# Altium PCB FROGSBORO.PcbDoc (part 3 of 3)
Units mm, origin at the board's own origin, x right, y up, seen from the top; angles counter-clockwise.
Board outline 36.5 x 67 mm, 6 copper layers (Top Layer, GND, SIGV, SIGH, Power, Bottom Layer), stack 1.197 mm thick; 116 components, 83 nets, 599 pads, 359 vias.
Unrouted connection lines stored in the file: 50.
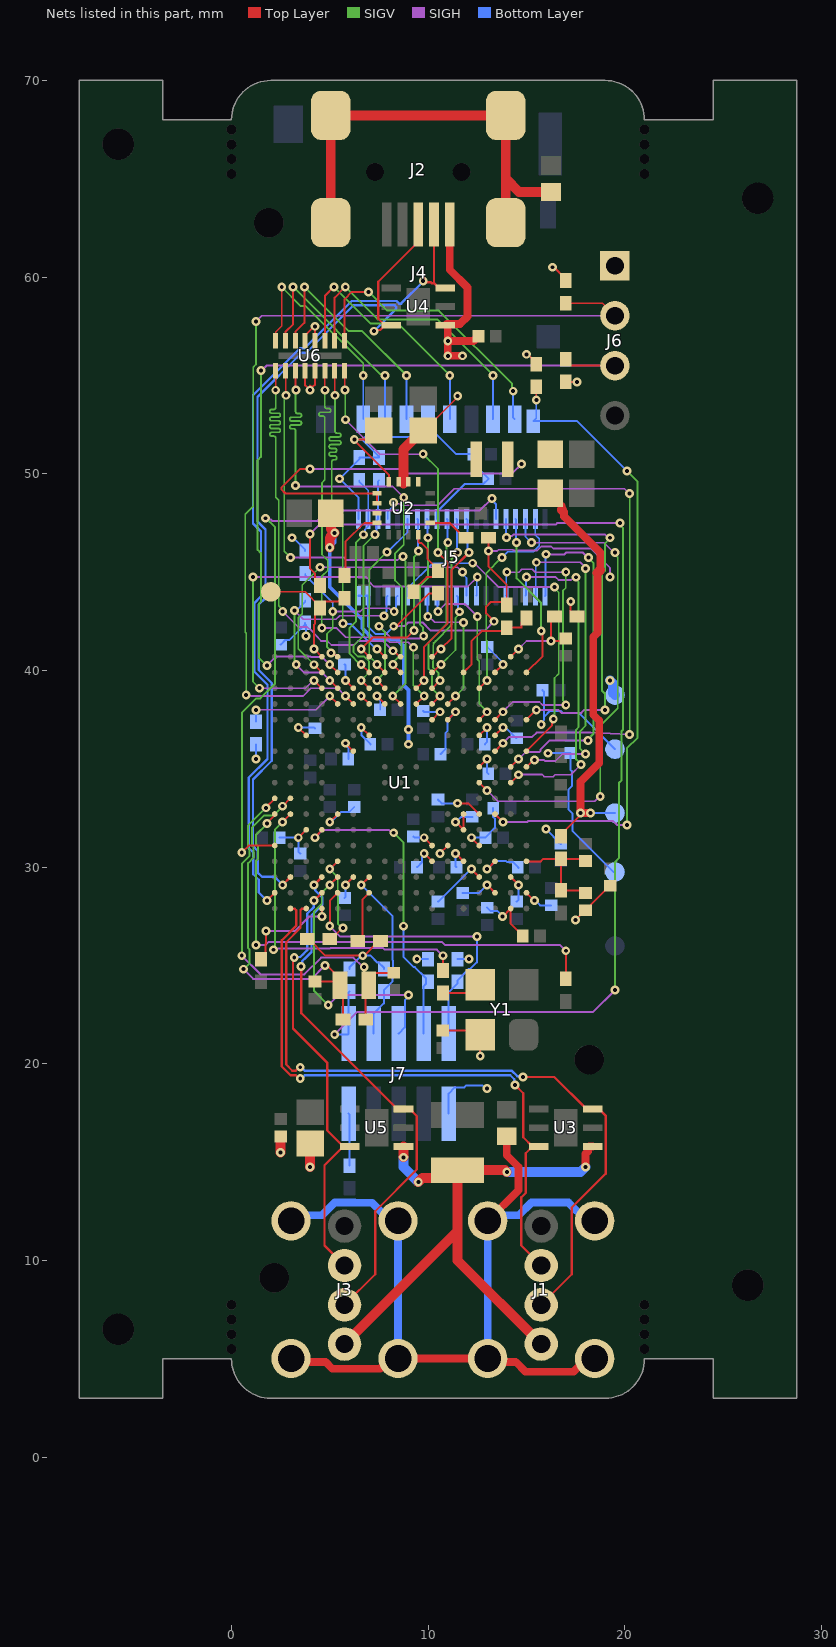
[diagram p6: the nets of this part, all layers, seen from the top]

## Via types
v1: diameter 0.45, hole 0.2, Top Layer to Bottom Layer, tented both sides, 359 vias

## Nets (pads, with @x,y where several pads share a name; then routed paths per layer and width w, separated by ;. In a path a pad name is that pad's centre, name@x,y a point inside that pad or via, vN(x,y) a via of type N, cw(c..) or ccw(c..) an arc to the next point about the centre after c; other vN are vias at no path point) (continued)
NetC46_2: C46.2 R10.2 U1.U10 Y2.2 | length 20.5
  Top Layer w0.102: v1(1.75,33.018) 1.75,33.034 2.2,33.484 U1.U10@2.2,33.5 ; v1(6.75,24.928) 6.75,24.225 Y2.2@6.975,24 ; R10.2@6.825,22.25 6.825,23.85 Y2.2@6.975,24 ; C46.2@8.25,24.63 7.299,24.63 6.975,24.306 Y2.2@6.975,24
  SIGH w0.102: v1(0.525,25.5) 1.477,24.548 2.036,24.548 3.711,24.548 4.566,25.403 6.203,25.403 6.677,24.928 v1(6.75,24.928)
  SIGV w0.102: v1(0.525,25.5) 0.525,30.18 0.928,30.583 0.928,30.917 0.837,31.008 0.837,32.105 v1(1.75,33.018)
NetC47_2: C47.2 R10.1 U1.T10 Y2.1 | length 19.2
  Top Layer w0.102: v1(2.6,33.1) U1.T10@3,33.5 ; C47.2@4.25,24.19 5.335,24.19 Y2.1@5.525,24 ; v1(4.75,25) 4.817,24.933 4.917,24.933 5.525,24.325 Y2.1@5.525,24 ; R10.1@5.675,22.25 5.675,23.85 Y2.1@5.525,24
  SIGH w0.102: v1(0.617,24.814) 1.105,24.325 4.075,24.325 v1(4.75,25)
  SIGV w0.102: v1(0.617,24.814) 0.928,25.125 0.928,25.805 0.847,25.885 0.847,30.21 1.134,30.498 1.134,31.002 1.043,31.093 1.043,32.009 1.65,32.616 2.116,32.616 v1(2.6,33.1)
NetC48_2: C48.2 R14.1 U1.B1 | length 4.2
  Top Layer w0.089: R14.1@16.25,42.494 v1(16.25,41.5) 16.87,41.5 C48.2@17,41.63
  Top Layer w0.102: U1.B1@14.2,40.7 v1(14.6,41.1)
  SIGH w0.089: v1(14.6,41.1) 15,41.5 v1(16.25,41.5)
NetC58_2: C58.2 C60.1 R5.1 R6.2 U1.A14 | length 6
  Top Layer w0.102: U1.A14@15,30.3 15.731,30.3 15.856,30.425 R5.1@16.75,30.425 ; C58.2@18,28.69 17.865,28.825 R6.2@16.75,28.825 R5.1@16.75,30.425 ; C60.1@18,30.31 17.885,30.425 R5.1@16.75,30.425
NetJ4_1: J4.1 U6.8 | length 11.5
  Top Layer w0.089: U6.8@2.25,56.765 2.25,57.209 2.557,57.517 v1(2.557,59.5)
  SIGV w0.089: v1(2.557,59.5) 3.53,58.527 3.783,58.527 6.699,55.612 v1@6.699,55.001
  Bottom Layer w0.089: J4.1@6.7,52.775 v1(6.7,55)
NetJ4_2: J4.2 U6.7 | length 11.6
  Top Layer w0.102: U6.7@2.75,56.765 2.75,57.216 3.134,57.6 v1(3.134,59.5)
  SIGV w0.102: v1(3.134,59.5) 7.568,55.067 7.733,55.067 v1(7.8,55)
  Bottom Layer w0.102: J4.2@7.8,52.775 v1(7.8,55)
NetJ4_3: J4.3 U6.6 | length 12.2
  Top Layer w0.102: U6.6@3.25,56.765 3.25,57.216 3.711,57.677 v1(3.711,59.5)
  SIGV w0.102: v1(3.711,59.5) 5.962,57.25 6.65,57.25 v1(8.9,55)
  Bottom Layer w0.102: J4.3@8.9,52.775 v1(8.9,55)
NetJ4_5: J4.5 U6.3 | length 12.9
  Top Layer w0.102: U6.3@4.75,56.765 4.75,59.039 v1(5.211,59.5)
  SIGV w0.102: v1(5.211,59.5) 7.061,57.651 8.449,57.651 v1(11.1,55)
  Bottom Layer w0.102: J4.5@11.1,52.775 v1(11.1,55)
NetJ4_7: J4.7 U6.2 | length 14.6
  Top Layer w0.102: U6.2@5.25,56.765 5.25,58.962 v1(5.788,59.5)
  SIGV w0.102: v1(5.788,59.5) 7.431,57.857 10.459,57.857 13.29,55.027 v1(13.29,54.99)
  Bottom Layer w0.102: v1(13.29,54.99) 13.29,52.785 J4.7@13.3,52.775
NetJ4_8: J4.8 U6.1 | length 14.6
  Top Layer w0.102: U6.1@5.75,56.765 5.75,58.884 6.116,59.25 v1(6.975,59.25)
  SIGV w0.102: v1(6.975,59.25) 7.925,58.3 10.55,58.3 14.273,54.577 14.273,54.252 v1(14.325,54.2)
  Bottom Layer w0.102: v1(14.325,54.2) 14.325,52.85 J4.8@14.4,52.775
NetJ4_9: J4.9 R19.1 U1.C11 | length 33
  Top Layer w0.089: v1(15.5,53.75) R19.1@15.5,54.425
  Top Layer w0.102: U1.C11@13.4,32.7 v1(13.8,32.3)
  SIGH w0.102: v1(13.8,32.3) 15.042,32.3 15.085,32.343 19.407,32.343 19.602,32.148 v1(20.102,32.148)
  SIGV w0.102: v1(20.102,32.148) 20.102,36.036 20.649,36.583 20.649,49.601 v1(20.102,50.148)
  Bottom Layer w0.089: J4.9@15.35,52.675 15.5,52.825 v1(15.5,53.75)
  Bottom Layer w0.102: J4.9@15.35,52.675 17.575,52.675 v1(20.102,50.148)
NetJ5_3: J5.3 R20.1 U1.L2 | length 10.8
  Top Layer w0.102: v1(6.6,40.3) U1.L2@7,39.9
  SIGV w0.089: 6.339,42.505 6.339,46.522 v1(6.721,46.904)
  SIGV w0.102: 6.339,42.505 6.005,42.172 6.005,40.854 6.559,40.3 v1(6.6,40.3)
  Bottom Layer w0.089: R20.1@6.5,49.675 6.5,49.6 6.95,49.15 J5.3@6.95,47.7 6.95,47.325 6.79,47.165 6.79,46.973 v1(6.721,46.904)
NetJ5_5: J5.5 R21.1 U1.L3 | length 12
  Top Layer w0.102: v1(6.6,39.5) U1.L3@7,39.1
  SIGV w0.089: v1(6.6,39.5) 6.996,39.896 6.996,40.464 6.755,40.706 6.437,40.706 6.206,40.937 6.206,41.263 6.717,41.775 6.717,46.34 7.297,46.92 v1(7.297,46.922)
  Bottom Layer w0.089: v1(7.297,46.922) 7.297,47.02 7.369,47.092 7.369,47.619 J5.5@7.45,47.7 7.45,49.625 R21.1@7.5,49.675
NetJ5_7: J5.7 U1.C7 | length 33
  Top Layer w0.102: U1.C7@13.4,35.9 v1(13.8,36.3)
  SIGH w0.089: v1(8.24,48.541) 8.309,48.472 8.519,48.472 8.595,48.396 10.486,48.396 11.336,49.246 19.986,49.246 20.232,49 v1(20.246,49) ; v1(13.8,36.3) 14.125,36.625 15.297,36.625 15.516,36.843 18.262,36.843 v1(20.246,36.75)
  SIGV w0.089: v1(20.246,36.75) v1(20.246,49)
  Bottom Layer w0.089: J5.7@7.95,47.7 7.95,48.075 8.171,48.296 8.171,48.472 v1(8.24,48.541)
NetJ5_8: J5.8 R22.1 U1.N3 | length 12.1
  Top Layer w0.102: v1(5,39.5) U1.N3@5.4,39.1
  SIGH w0.089: v1(3.201,43.049) 3.646,42.604 5.316,42.604 5.502,42.789 7.731,42.789 v1(7.75,42.77)
  SIGH w0.102: v1(3.295,40.3) 3.703,39.892 4.608,39.892 v1(5,39.5)
  SIGV w0.102: v1(3.201,43.049) 3.201,40.534 3.228,40.507 3.228,40.367 v1(3.295,40.3)
  Bottom Layer w0.089: v1(3.201,43.049) 3.27,43.118 3.368,43.118 3.75,43.5 R22.1@3.75,43.575 ; v1(7.75,42.77) 7.75,42.868 7.88,42.997 7.88,43.73 J5.8@7.95,43.8
NetJ5_10: J5.10 R23.1 U1.N1 | length 9.4
  Top Layer w0.102: v1(5.056,40.898) 5.122,40.832 5.217,40.832 5.349,40.7 U1.N1@5.4,40.7
  SIGH w0.089: v1(5.152,43) 6.551,43 6.718,43.166 8.019,43.166 8.178,43.007 v1(8.276,43.007)
  SIGV w0.089: v1(5.056,40.898) 5.056,40.996 4.854,41.198 4.854,41.854 5.152,42.153 v1(5.152,43)
  Bottom Layer w0.089: R23.1@3.75,44.925 3.75,44.85 5.152,43.448 v1(5.152,43) ; v1(8.276,43.007) 8.276,43.105 8.369,43.198 8.369,43.719 J5.10@8.45,43.8
NetJ5_11: J5.11 U1.K2 | length 9
  Top Layer w0.102: v1(7.4,40.3) U1.K2@7.8,39.9
  SIGV w0.089: v1(7.4,40.3) 7.4,40.335 7.006,40.729 7.006,45.132 v1(7.906,46.033)
  Bottom Layer w0.089: v1(7.906,46.033) 7.949,46.033 8.95,47.033 J5.11@8.95,47.7
NetJ5_12: J5.12 U1.A7 | length 18
  Top Layer w0.102: U1.A7@15,35.9 16.294,37.194 16.294,37.265 16.299,37.269 16.299,37.476 v1(16.364,37.541)
  SIGH w0.089: v1(12.266,45.455) 12.356,45.455 13.561,44.25 v1(16.427,44.25)
  SIGV w0.089: v1(16.364,37.541) 16.427,37.604 16.427,39.616 16.646,39.836 16.646,43.963 16.427,44.182 v1(16.427,44.25)
  Bottom Layer w0.089: J5.12@8.95,43.8 8.95,44.175 10.23,45.455 v1(12.266,45.455)
NetJ5_13: J5.13 U1.L1 | length 9.4
  Top Layer w0.102: U1.L1@7,40.7 v1(6.6,41.1) 7.171,41.67 8.909,41.67 v1(9.275,42.036)
  SIGV w0.102: v1(9.275,42.036) 9.275,45.765 9.504,45.994 v1(9.504,46.073)
  Bottom Layer w0.102: J5.13@9.45,47.7 9.475,47.675 9.475,46.102 v1(9.504,46.073)
NetJ5_15: J5.15 U1.K3 | length 12.4
  Top Layer w0.102: v1(7.4,39.5) U1.K3@7.8,39.1
  SIGH w0.102: v1(7.5,42.25) 7.514,42.25 8.128,41.635 9.567,41.635 9.681,41.749 v1(9.775,41.749)
  SIGV w0.102: v1(7.4,39.5) 7.803,39.903 7.803,41.947 v1(7.5,42.25) ; v1(9.775,41.749) 9.75,42.177 9.581,42.346 9.581,44.292 10,44.71 v1(10,46.75)
  Bottom Layer w0.102: J5.15@9.95,47.7 9.975,47.675 9.975,46.775 v1(10,46.75)
NetJ5_16: J5.16 U1.F4 | length 7.5
  Top Layer w0.102: U1.F4@11,38.3 v1(11.4,38.7)
  SIGH w0.089: v1(9.984,42.742) 10.043,42.742 10.336,42.449 v1(11.8,42.449)
  SIGV w0.089: v1(11.4,38.7) 11.8,39.1 v1(11.8,42.449)
  Bottom Layer w0.089: J5.16@9.95,43.8 9.967,43.783 9.967,42.759 v1(9.984,42.742)
NetJ5_18: J5.18 U1.D5 | length 8.9
  Top Layer w0.102: U1.D5@12.6,37.5 v1(13,37.9)
  SIGH w0.089: v1(10.5,43) 10.884,43.384 11.866,43.384 v1(12.5,42.75)
  SIGV w0.089: v1(12.5,42.75) 12.5,40.575 12.596,40.479 12.596,38.304 v1(13,37.9)
  Bottom Layer w0.089: J5.18@10.45,43.8 10.475,43.775 10.475,43.025 v1(10.5,43)
NetJ5_19: J5.19 U1.G4 | length 10.2
  Top Layer w0.102: U1.G4@10.2,38.3 v1(10.6,38.7)
  SIGV w0.102: v1(10.6,38.7) 10.195,39.105 10.195,39.911 10.025,40.081 10.025,41.429 10.178,41.582 10.903,42.333 10.933,42.364 10.933,46.433 v1(11,46.5)
  Bottom Layer w0.102: J5.19@10.95,47.7 10.975,47.675 10.975,46.525 v1(11,46.5)
NetJ5_21: J5.21 U1.G3 | length 9.4
  Top Layer w0.102: U1.G3@10.2,39.1 v1(10.6,39.5)
  SIGV w0.089: 10.281,41.393 10.256,41.263 10.256,41.229 10.256,40.466 10.254,40.464 10.254,40.136 10.531,39.858 10.531,39.569 v1(10.6,39.5)
  SIGV w0.102: 10.281,41.393 10.385,41.497 11.14,42.278 11.191,42.351 11.191,45.691 v1(11.5,46)
  Bottom Layer w0.102: J5.21@11.45,47.7 11.475,47.675 11.475,46.025 v1(11.5,46)
NetJ5_22: J5.22 U1.G2 | length 4.6
  Top Layer w0.102: U1.G2@10.2,39.9 10.225,39.9 10.625,40.3 v1(10.65,40.3)
  SIGV w0.089: v1(10.65,40.3) 11.391,41.041 11.391,42.687 11.593,42.89 v1(11.593,42.988)
  Bottom Layer w0.089: J5.22@11.45,43.8 11.524,43.726 11.524,43.057 v1(11.593,42.988)
NetJ5_23: J5.23 U1.G1 | length 7.9
  Top Layer w0.102: U1.G1@10.2,40.7 10.225,40.7 10.625,41.1 v1(10.65,41.1) ; v1@10.6,41.1 v1(10.65,41.1) ; v1(12.077,46) 11.191,45.114 11.191,41.64 v1(10.65,41.1)
  Bottom Layer w0.102: J5.23@11.95,47.7 12.013,47.636 12.013,46.064 v1(12.077,46)
NetJ5_24: J5.24 U1.P2 | length 14.9
  Top Layer w0.102: v1(4.2,40.294) 4.203,40.294 4.597,39.9 U1.P2@4.6,39.9
  SIGH w0.089: v1(4.5,45.25) 11.493,45.25 11.743,45 v1(11.75,45)
  SIGV w0.089: v1(4.2,40.294) 4.2,40.306 3.401,41.104 3.401,42.688 3.598,42.885 3.598,44.348 v1(4.5,45.25)
  Bottom Layer w0.089: v1(11.75,45) 11.75,44.902 11.95,44.702 J5.24@11.95,43.8
NetJ5_26: J5.26 U1.P3 | length 22.1
  Top Layer w0.102: v1(4.2,39.489) 4.206,39.489 4.594,39.1 U1.P3@4.6,39.1
  SIGH w0.089: v1(1.097,44.75) 6.854,44.75 7,44.604 7,44.514 7.244,44.269 12.019,44.269 v1(12.5,44.75) ; v1(1.42,39.1) 3.765,39.1 4.154,39.489 v1(4.2,39.489)
  SIGV w0.089: v1(1.097,44.75) 1.097,39.423 v1(1.42,39.1)
  Bottom Layer w0.089: J5.26@12.45,43.8 12.475,43.825 12.475,44.725 v1(12.5,44.75)
NetJ5_29: J5.29 U1.U13 | length 33
  Top Layer w0.102: v1(0.525,30.75) 0.875,31.1 U1.U13@2.2,31.1
  SIGH w0.102: v1(1.734,47.742) 1.801,47.675 2.008,47.675 2.084,47.599 4.359,47.599 4.899,48.139 12.639,48.139 v1(13.25,48.75)
  SIGV w0.102: v1(0.525,30.75) 0.525,37.845 1.259,38.579 1.469,38.579 2.203,39.313 2.203,47.297 1.758,47.742 v1(1.734,47.742)
  Bottom Layer w0.102: v1(13.25,48.75) 13.25,48.656 13.45,48.456 J5.29@13.45,47.7
NetJ5_31: J5.31 U1.A5 | length 19.7
  Top Layer w0.102: U1.A5@15,37.5 v1(15.5,38)
  SIGH w0.102: v1(13.987,46.763) 14.053,46.83 14.26,46.83 14.333,46.903 19.003,46.903 19.156,46.75 v1(19.25,46.75) ; v1(15.5,38) 16.623,38 16.776,37.847 17.793,37.847 17.946,38 v1(19,38)
  SIGV w0.102: v1(19,38) 19,38.804 18.847,38.957 18.847,44.917 19,45.07 19,46.466 19.25,46.716 v1(19.25,46.75)
  Bottom Layer w0.102: J5.31@13.95,47.7 13.968,47.682 13.968,46.782 v1(13.987,46.763)
NetJ5_32: J5.32 U1.C5 | length 15.2
  Top Layer w0.102: U1.C5@13.4,37.5 v1(13.8,37.9)
  SIGH w0.089: v1(13.8,37.9) 14.296,38.396 15.664,38.396 15.811,38.25 v1(17,38.25) ; v1(14,45) 14.622,45 14.769,45.146 15.293,45.146 15.439,45 v1(17,45)
  SIGV w0.089: v1(17,38.25) 17,38.348 16.854,38.494 16.854,44.046 17,44.192 v1(17,45)
  Bottom Layer w0.089: J5.32@13.95,43.8 13.975,43.825 13.975,44.975 v1(14,45)
NetJ5_33: J5.33 U1.A2 | length 8.7
  Top Layer w0.102: U1.A2@15,39.9 15.803,40.703 15.803,41.947 v1(15.75,42)
  SIGV w0.102: v1(14.5,46.5) 14.5,44.68 15.75,43.43 v1(15.75,42)
  Bottom Layer w0.102: J5.33@14.45,47.7 14.475,47.675 14.475,46.525 v1(14.5,46.5)
NetJ5_35: J5.35 U1.D9 | length 25.3
  Top Layer w0.102: U1.D9@12.6,34.3 v1(13,33.9)
  SIGH w0.089: v1(13,33.9) 13.546,33.354 18.479,33.354 18.715,33.59 v1(18.75,33.59) ; v1(15.25,46.5) 18.939,46.5 19.439,46 v1(19.5,46)
  SIGV w0.089: v1(18.75,33.59) 18.75,37.189 19.644,38.084 19.644,45.758 19.5,45.902 v1(19.5,46)
  Bottom Layer w0.089: J5.35@14.95,47.7 14.95,46.8 v1(15.25,46.5)
NetJ5_36: J5.36 U1.B9 | length 17.4
  Top Layer w0.102: U1.B9@14.2,34.3 v1(14.6,34.7)
  SIGH w0.089: v1(15,44.75) 16.488,44.75 16.634,44.604 17.28,44.604 17.418,44.742 v1(17.516,44.742) ; 15.78,34.7 15.814,34.7 15.911,34.604 16.355,34.604 16.451,34.7 17.25,34.7 v1(17.77,35.221)
  SIGH w0.102: v1(14.6,34.7) 15.78,34.7
  SIGV w0.089: v1(17.516,44.742) 17.516,44.644 17.646,44.514 17.646,37.109 17.531,36.993 17.523,36.985 17.523,35.48 17.77,35.233 v1(17.77,35.221)
  Bottom Layer w0.089: J5.36@14.95,43.8 14.975,43.825 14.975,44.725 v1(15,44.75)
NetJ5_37: J5.37 U1.D3 | length 10.8
  Top Layer w0.102: U1.D3@12.6,39.1 v1(13,39.5)
  SIGV w0.089: 13,41.48 12.952,41.528 12.952,44.952 v1(13.75,45.75)
  SIGV w0.102: v1(13,39.5) 13,41.48
  Bottom Layer w0.089: v1(13.75,45.75) 14.04,46.04 15.35,46.04 15.646,46.336 15.646,46.692 15.45,46.888 J5.37@15.45,47.7
NetJ5_38: J5.38 U1.A8 | length 17.4
  Top Layer w0.102: U1.A8@15,35.1 15.023,35.1 15.377,35.454 v1(15.4,35.454)
  SIGH w0.089: v1(15.4,35.454) 15.876,35.454 15.934,35.396 16.471,35.396 16.825,35.75 v1(18,35.75) ; v1(15.5,45.5) 17.743,45.5 18,45.243 v1(18,45.192)
  SIGV w0.089: v1(18,35.75) 17.725,36.025 17.725,36.913 18,37.188 v1(18,45.192)
  Bottom Layer w0.089: J5.38@15.45,43.8 15.475,43.825 15.475,45.475 v1(15.5,45.5)
NetJ5_40: J5.40 U1.B8 | length 18.5
  Top Layer w0.102: U1.B8@14.2,35.1 v1(14.6,35.5)
  SIGH w0.089: v1(14.6,35.5) 14.95,35.85 15.649,35.85 15.708,35.909 15.708,35.972
  SIGH w0.102: 15.708,35.972 16.182,36.447 v1(18.121,36.447) ; v1(16,45.91) 16.934,45.91 17.024,46 17.864,46 18.114,45.75 v1(18.148,45.75)
  SIGV w0.102: v1(18.121,36.447) 18.121,36.49 18.403,36.771 18.403,45.471 18.148,45.726 v1(18.148,45.75)
  Bottom Layer w0.102: J5.40@15.95,43.8 15.975,43.825 15.975,45.885 v1(16,45.91)
NetJ6_2: J6.2 R24.1 U1.M4 | length 46.3
  Top Layer w0.089: R24.1@17,58.675 18.865,58.675 J6.2@19.5,58.04
  Top Layer w0.102: v1(5.8,38.7) U1.M4@6.2,38.3
  SIGH w0.089: v1(0.75,38.75) 0.796,38.704 3.643,38.704 4.032,39.092 4.716,39.092 4.72,39.096 5.404,39.096 v1(5.8,38.7) ; v1(1.25,57.75) 1.54,58.04 J6.2@19.5,58.04
  SIGV w0.089: v1(0.75,38.75) 0.75,41.891 0.701,41.94 0.701,47.951 1.104,48.354 1.104,55.414 1.25,55.561 v1(1.25,57.75)
NetJ6_3: J6.3 R25.1 U1.N2 | length 40.3
  Top Layer w0.102: v1(5,40.3) U1.N2@5.4,39.9 ; R25.1@17,55.825 17,55.75 17.249,55.501 J6.3@19.499,55.501
  SIGH w0.102: v1(1.5,55.25) 1.534,55.25 1.784,55.5 J6.3@19.5,55.5 ; v1(1.8,40.25) 2.253,40.703 4.028,40.703 4.033,40.697 4.603,40.697 v1(5,40.3)
  SIGV w0.102: v1(1.5,55.25) 1.5,50.858 1.331,50.689 1.331,46.13 1.5,45.961 1.5,43.499 1.397,43.396 1.397,40.653 v1(1.8,40.25)
NetJ7_2: J7.2 R29.1 U1.N16 | length 15.1
  Top Layer w0.102: v1(5,27.003) 5.002,27.005 5.002,27.321 5.013,27.333 5.013,28.313 U1.N16@5.4,28.7
  SIGH w0.102: v1(5,27.003) 5.533,26.471 v1(12.48,26.471)
  Bottom Layer w0.102: J7.2@11.04,21.535 11.04,23.64 11.5,24.1 11.5,24.25 12.08,24.83 12.149,24.83 12.48,25.16 v1(12.48,26.471)
NetJ7_4: J7.4 R28.1 U1.P12 | length 15.8
  Top Layer w0.102: v1(4.25,31.5) 4.25,31.525 4.6,31.875 U1.P12@4.6,31.9
  SIGH w0.102: v1(4.25,31.5) 4.653,31.903 8.003,31.903 8.156,31.75 v1(8.25,31.75)
  SIGV w0.102: v1(8.25,31.75) 8.75,31.25 v1(8.75,27)
  Bottom Layer w0.102: v1(8.75,27) 8.75,25.43 9.258,24.922 9.328,24.922 9.885,24.365 9.885,24.06 9.77,23.945 J7.4@9.77,21.535
NetJ7_6: J7.6 U1.N15 | length 13.8
  Top Layer w0.102: v1(5,29.1) U1.N15@5.4,29.5
  SIGH w0.102: v1(4.921,22.99) 5.431,23.5 v1(9,23.5)
  SIGV w0.089: 4.214,27.754 4.24,27.78 4.596,28.136 4.596,28.696 v1(5,29.1)
  SIGV w0.102: 4.214,27.754 4.208,27.747 4.208,23.704 v1(4.921,22.99)
  Bottom Layer w0.102: J7.6@8.5,21.535 8.819,21.854 8.819,23.225 9,23.406 v1(9,23.5)
NetJ7_8: J7.8 R26.1 U1.L15 | length 9.2
  Top Layer w0.102: v1(6.6,29.1) U1.L15@7,29.5
  Bottom Layer w0.102: v1(6.6,29.1) 8.2,27.5 8.2,25.27 8.206,25.265 8.206,24.385 8.2,24.38 8.2,24.2 7.75,23.75 R26.1@7.75,23.675 7.75,23.08 7.23,22.56 J7.8@7.23,21.535
NetJ7_9: J7.9 R33.1 | length 2.7
  Bottom Layer w0.102: J7.9@5.96,17.465 6,17.425 R33.1@6,14.825
NetJ7_10: J7.10 R16.1 R30.1 | length 60.9
  Top Layer w0.102: v1(4,46.948) 4,45.18 4.251,44.93 4.251,44.574 R16.1@4.5,44.325
  SIGH w0.102: v1(4,46.948) 4.47,47.418 16.48,47.418 16.562,47.5 v1(19.75,47.5) ; v1(5.25,21.5) 6.375,22.625 18.375,22.625 v1(19.5,23.75)
  SIGV w0.102: v1(19.5,23.75) 19.5,30.261 19.7,30.461 19.7,34.279 19.844,34.423 19.844,36.917 19.903,36.976 19.903,47.253 19.75,47.406 v1(19.75,47.5)
  Bottom Layer w0.102: v1(5.25,21.5) 5.925,21.5 J7.10@5.96,21.535 5.96,23.635 R30.1@6,23.675
NetL1_1: L1.1 U2.5
NetR1_1: R1.1 U2.1 | length 2.1
  Top Layer w0.102: U2.1@10.1,47.5 11.1,47.5 11.85,46.75 R1.1@11.925,46.75
NetR2_1: R2.1 R3.2 U2.16 | length 4.1
  Top Layer w0.102: R3.2@9.25,44 9.25,44.075 9.926,44.751 10.251,44.751 10.5,45 R2.1@10.5,45.075 10.5,45.15 9.961,45.689 9.961,46.186 9.671,46.476 9.574,46.476 9.5,46.55 U2.16@9.5,46.9
NetR8_1: R8.1 Y1.3 | length 2.1
  Top Layer w0.102: R8.1@10.75,23.6 12.23,23.6 Y1.3@12.65,24.02
NetR8_2: R8.2 U1.T11 | length 16.8
  Top Layer w0.102: v1(2.6,32.3) U1.T11@3,32.7 ; R8.2@10.75,24.75 v1(10.75,25.5)
  SIGH w0.102: v1(2.137,25.803) 2.196,25.862 4.997,25.862 5.039,25.903 7.693,25.903 7.785,25.811 10.439,25.811 v1(10.75,25.5)
  SIGV w0.102: v1(2.137,25.803) 2.203,25.869 2.203,31.903 v1(2.6,32.3)
NetR9_2: R9.2 U1.U11 | length 24.5
  Top Layer w0.102: v1(1.816,32.213) 1.816,32.266 2.2,32.649 U1.U11@2.2,32.7 ; R9.2@17,24.325 v1(17,25.75)
  SIGH w0.102: v1(1.25,26.052) 1.747,26.052 1.901,26.205 10.696,26.205 10.85,26.052 16.698,26.052 v1(17,25.75)
  SIGV w0.102: v1(1.25,26.052) 1.25,30.321 1.341,30.412 1.341,31.088 1.25,31.179 1.25,31.646 v1(1.816,32.213)
NetR11_1: R11.1 U1.L16 | length 2.7
  Top Layer w0.102: R11.1@6.425,26.25 6.653,26.478 6.653,28.353 U1.L16@7,28.7
NetR12_1: R12.1 U1.P17 | length 5.1
  Top Layer w0.102: R12.1@1.5,25.325 1.734,25.559 1.734,26.103 1.75,26.12 v1(1.75,26.75) ; U1.P17@4.6,27.9 4.605,27.895 4.605,27.505 v1(4.611,27.5)
  SIGH w0.102: v1(1.75,26.75) 3.22,26.75 3.97,27.5 v1(4.611,27.5)
NetR13_2: R13.2 U1.N14 | length 4.8
  Top Layer w0.089: R13.2@5.003,26.351 5.078,26.351 5.634,26.908 v1(5.665,26.908)
  Top Layer w0.102: v1(5,29.9) U1.N14@5.4,30.3
  SIGV w0.089: v1(5,29.9) 5.404,29.496 5.404,28.478 5.418,28.464 5.418,27.138 5.4,27.12 5.612,26.908 v1(5.665,26.908)
NetR15_1: R15.1 U2.12 | length 3.5
  Top Layer w0.089: R15.1@5.796,45.075 5.796,46.54 6.756,47.5 U2.12@7.4,47.5
NetR15_2: R15.2 R16.2 TP1.0 U1.P1 | length 7.2
  Top Layer w0.089: TP1.0@2,44 3.75,44 4.5,43.25 R16.2@4.5,43.175
  Top Layer w0.102: R16.2@4.5,43.175 4.251,42.926 4.251,42.382 4.192,42.323 4.192,41.989 4.2,41.98 v1(4.2,41.1) U1.P1@4.6,40.7 ; R16.2@4.5,43.25 4.749,43.499 5.399,43.499 5.75,43.85 R15.2@5.75,43.925
NetR27_1: R27.1 U1.N4 | length 5.2
  Top Layer w0.102: v1(5,38.7) U1.N4@5.4,38.3
  SIGH w0.089: v1(1.25,38) 4.3,38 v1(5,38.7)
  Bottom Layer w0.102: R27.1@1.25,37.4 v1(1.25,38)
NetR31_2: R31.2 R32.2 U1.E2 | length 5.2
  Top Layer w0.102: U1.E2@11.8,39.9 12.2,40.3 12.2,41.48 12.72,42 13.825,42 R31.2@14,42.175 14.75,42.175 14.751,42.426 R32.2@15,42.675
NetU1_H3: U1.H3 U6.16 | length 20.2
  Top Layer w0.089: U6.16@5.75,55.235 5.763,55.222 5.763,54.276 v1(5.775,54.263)
  Top Layer w0.102: U1.H3@9.4,39.1 9.4,39.103 9.794,39.497 v1(9.794,39.5) ; v1@9.8,39.5 9.794,39.506 9.794,41.199 10.975,42.379 10.975,45.525 v1(10.5,46)
  SIGH w0.089: v1(5.8,52.75) 7.55,51 v1(9.75,51)
  SIGV w0.089: v1(5.775,54.263) 5.788,54.251 5.788,52.762 v1(5.8,52.75) ; v1(9.75,51) 10.5,50.25 v1(10.5,46)
NetU1_H4: U1.H4 U6.14 | length 22.7
  Top Layer w0.089: v1(4.75,54.25) U6.14@4.75,55.235
  Top Layer w0.102: U1.H4@9.4,38.3 v1(9.8,38.7)
  SIGH w0.089: v1(4.594,42.156) 5.345,42.156 5.81,41.69 7.79,41.69 8.047,41.433 8.995,41.433 v1(9.25,41.178)
  SIGV w0.089: v1(4.594,42.156) 4.594,44.784 4.896,45.086 4.896,45.604 4.604,45.896 4.604,49.546 4.75,49.692 4.75,52.791 4.75,52.836 ccw(c4.653,52.836) 4.653,52.933 4.547,52.933 cw(c4.547,53.03) 4.45,53.03 cw(c4.547,53.03) 4.547,53.127 4.953,53.127 ccw(c4.953,53.224) 5.05,53.224 ccw(c4.953,53.224) 4.953,53.321 4.847,53.321 cw(c4.847,53.418) 4.75,53.418 4.75,53.6 v1(4.75,54.25) ; v1(9.25,41.178) 9.25,39.25 v1(9.8,38.7)
NetU1_J1: U1.J1 U6.9 | length 22.8
  Top Layer w0.089: v1(2.25,54.25) U6.9@2.25,55.235
  Top Layer w0.102: v1@8.2,41.1 v1@8.253,41.047 ; v1(8.206,41.001) v1@8.253,41.047 ; U1.J1@8.6,40.7 8.553,40.7 8.253,41.001 v1@8.253,41.047
  SIGH w0.089: v1(2.606,43) 3.395,42.21 3.85,42.21 4.041,42.059 cw(c3.796,41.75) 4.088,42.015 4.512,41.549 4.564,41.496 4.601,41.496 4.883,41.496 5.086,41.294 6.233,41.294 6.436,41.496 7.71,41.496 v1(8.206,41.001)
  SIGV w0.089: v1(2.25,54.25) 2.25,53.7 2.25,53.371 cw(c2.153,53.371) 2.153,53.274 2.047,53.274 ccw(c2.047,53.177) 1.95,53.177 ccw(c2.047,53.177) 2.047,53.08 2.39,53.08 cw(c2.39,52.983) 2.487,52.983 cw(c2.39,52.983) 2.39,52.886 2.047,52.886 ccw(c2.047,52.789) 1.95,52.789 ccw(c2.047,52.789) 2.047,52.692 2.39,52.692 cw(c2.39,52.595) 2.487,52.595 cw(c2.39,52.595) 2.39,52.498 2.047,52.498 ccw(c2.047,52.401) 1.95,52.401 ccw(c2.047,52.401) 2.047,52.304 2.39,52.304 cw(c2.39,52.207) 2.487,52.207 cw(c2.39,52.207) 2.39,52.11 2.047,52.11 ccw(c2.047,52.013) 1.95,52.013 ccw(c2.047,52.013) 2.047,51.916 2.153,51.916 cw(c2.153,51.819) 2.25,51.819 2.25,51.775 2.25,48.803 2.403,48.65 2.403,43.3 2.606,43.098 v1(2.606,43)
NetU1_J2: U1.J2 U6.11 | length 23.2
  Top Layer w0.089: U6.11@3.25,55.235 3.263,55.222 3.263,54.276 v1(3.275,54.263)
  Top Layer w0.102: v1(8.206,40.3) 8.206,40.297 8.6,39.903 U1.J2@8.6,39.9
  SIGH w0.089: v1(3.25,49.403) 3.297,49.356 8.196,49.356 v1(8.759,48.793)
  SIGV w0.089: v1(3.25,49.403) 3.263,49.416 3.263,52.15 3.263,52.194 ccw(c3.166,52.194) 3.166,52.291 3.06,52.291 cw(c3.06,52.388) 2.963,52.388 cw(c3.06,52.388) 3.06,52.485 3.466,52.485 ccw(c3.466,52.582) 3.563,52.582 ccw(c3.466,52.582) 3.466,52.679 3.06,52.679 cw(c3.06,52.776) 2.963,52.776 cw(c3.06,52.776) 3.06,52.873 3.466,52.873 ccw(c3.466,52.97) 3.563,52.97 ccw(c3.466,52.97) 3.466,53.067 3.36,53.067 cw(c3.36,53.164) 3.263,53.164 3.263,53.425 3.263,54.251 v1(3.275,54.263) ; 8.653,42.214 8.653,42.826 8.67,42.844 8.67,44.223 8.32,44.573 8.32,45.952 8.759,46.392 v1(8.759,48.793)
  SIGV w0.102: v1(8.206,40.3) 8.206,40.394 8.653,40.841 8.653,42.214
NetU1_J4: U1.J4 U6.10 | length 23.5
  Top Layer w0.089: U6.10@2.75,55.235 2.758,55.227 2.758,54 v1(2.766,53.992)
  Top Layer w0.102: v1(8.2,38.7) U1.J4@8.6,38.3
  SIGH w0.089: v1(3.002,45.75) 5.704,45.75 5.84,45.614 8.445,45.614 8.618,45.788 v1(8.716,45.788)
  SIGV w0.089: v1(2.766,53.992) 2.766,53.894 2.681,53.809 2.681,46.072 v1(3.002,45.75) ; v1(8.2,38.7) 8.854,39.354 8.854,41.343 8.864,41.353 8.864,44.303 8.85,44.317 8.85,45.556 8.716,45.69 v1(8.716,45.788)
NetU1_K1: U1.K1 U6.15 | length 18.8
  Top Layer w0.089: U6.15@5.25,55.235 5.258,55.227 5.258,54 v1(5.266,53.992)
  Top Layer w0.102: v1(7.4,41.1) U1.K1@7.8,40.7
  SIGV w0.089: v1(5.266,53.992) 5.266,52.35 5.266,52.165 ccw(c5.363,52.165) 5.363,52.068 5.469,52.068 cw(c5.469,51.971) 5.566,51.971 cw(c5.469,51.971) 5.469,51.874 5.063,51.874 ccw(c5.063,51.777) 4.966,51.777 ccw(c5.063,51.777) 5.063,51.68 5.469,51.68 cw(c5.469,51.583) 5.566,51.583 cw(c5.469,51.583) 5.469,51.486 5.063,51.486 ccw(c5.063,51.389) 4.966,51.389 ccw(c5.063,51.389) 5.063,51.292 5.257,51.292 cw(c5.257,51.195) 5.354,51.195 cw(c5.257,51.195) 5.257,51.098 5.063,51.098 ccw(c5.063,51.001) 4.966,51.001 ccw(c5.063,51.001) 5.063,50.904 5.257,50.904 cw(c5.257,50.807) 5.354,50.807 cw(c5.257,50.807) 5.257,50.71 5.201,50.71 ccw(c5.201,50.613) 5.104,50.613 5.104,50.375 5.104,48.459 5.666,47.897 v1(5.666,42.393)
  Bottom Layer w0.102: v1(5.666,42.393) 5.696,42.363 6.069,42.363 7.331,41.1 v1(7.4,41.1)
USB_SHLDA: FB1.2 J2.S | length 22.4
  Top Layer w0.5: J2.S@5.05,62.769 J2.S@5.05,68.219 J2.S@13.95,68.219 13.95,65 ; J2.S@13.95,62.769 13.95,65 ; FB1.2@16.25,64.325 14.625,64.325 13.95,65
USB_SHLDBC: FB2.2 J1.S J3.S | length 48.1
  Top Layer w0.4: J3.S@3.03,5.02 3.2,4.85 4.78,4.85 5.13,4.5 7.544,4.5 8.064,5.02 J1.S@13.03,5.02 13.2,4.85 14.45,4.85 14.95,4.35 17.394,4.35 18.064,5.02 J1.S@18.47,5.02 ; J1.S@13.03,12.02 14.602,13.592 14.602,14.749 14,15.351 FB2.2@14,16.325
  Bottom Layer w0.4: J3.S@3.03,12.02 3.317,12.307 4.603,12.307 5.251,12.955 6.249,12.955 6.265,12.939 7.145,12.939 8.064,12.02 J3.S@8.47,12.02 J3.S@8.47,5.02 ; J1.S@13.03,5.02 J1.S@13.03,12.02 13.317,12.307 14.603,12.307 15.251,12.955 17.129,12.955 18.064,12.02 J1.S@18.47,12.02
USBA_N: J2.2 U1.U16 U4.3 | length 43.1
  Top Layer w0.117: v1(1.8,28.3) U1.U16@2.2,28.7 ; v1(9.75,59.802) 9.814,59.738 10.138,59.738 10.182,59.695 10.3,59.695 ; J2.2@10.3,62.674 10.3,59.695 ; U4.3@10.87,59.45 10.545,59.45 10.3,59.695
  Bottom Layer w0.117: v1(1.8,28.3) 1.389,28.711 1.389,29.357 1.109,29.638 1.109,30.747 0.874,30.982 0.874,34.543 1.831,35.5 1.831,39.27 1.167,39.934 1.167,43.433 1.508,43.774 1.508,47.073 1.101,47.48 1.101,53.996 3.483,56.378 3.709,56.378 6.118,58.787 8.396,58.787 8.53,58.653 8.627,58.653 9.75,59.776 v1(9.75,59.802)
USBA_P: J2.3 U1.T15 U4.6 | length 45.5
  Top Layer w0.117: v1(2.606,29.1) 2.606,29.103 3,29.497 U1.T15@3,29.5 ; v1(7.25,57.25) 7.314,57.314 7.569,57.314 U4.6@7.805,57.55 ; J2.3@9.5,62.674 9.5,61.799 7.466,59.765 7.466,57.889 U4.6@7.805,57.55 ; U4.6@7.805,57.55 U4.6@8.13,57.55 U4.6@7.805,57.55
  Bottom Layer w0.117: v1(2.606,29.1) 2.195,29.511 1.551,29.511 1.331,29.73 1.331,30.839 1.096,31.074 1.096,34.451 2.053,35.408 2.053,39.362 1.389,40.026 1.389,43.341 1.73,43.682 1.73,47.165 1.323,47.572 1.323,53.904 3.575,56.156 3.801,56.156 6.21,58.565 8.304,58.565 8.373,58.496 8.373,58.373 v1(7.25,57.25)
USBB_N: J1.2 U1.R17 U3.3 | length 36.9
  Top Layer w0.117: v1(3.498,19.829) 3.443,19.829 3.263,19.649 3.097,19.649 2.782,19.964 2.782,26.187 3.511,26.916 3.511,27.821 3.58,27.889 3.789,27.889 U1.R17@3.8,27.9 ; v1(14.829,19.329) 16.416,19.329 18.045,17.7 18.695,17.7 19.025,17.37 19.025,17.001 19.034,16.993 19.034,15.557 19.025,15.549 19.025,14.419 17.306,12.7 17.306,9.306 J1.2@15.75,7.75
  Bottom Layer w0.117: v1(3.498,19.829) 3.556,19.829 3.741,19.644 14.263,19.644 14.537,19.37 14.788,19.37 v1(14.829,19.329)
USBB_P: J1.3 U1.T17 U3.6 | length 31.6
  Top Layer w0.117: U1.T17@3,27.9 3.011,27.889 3.22,27.889 3.289,27.821 3.289,27.008 2.559,26.279 2.559,19.872 3.004,19.427 3.265,19.427 3.442,19.25 v1(3.5,19.25) ; v1(14.421,18.921) 14.837,18.505 14.837,16.268 U3.6@15.305,15.8 ; U3.6@15.63,15.8 U3.6@15.305,15.8 ; J1.3@15.75,9.75 14.736,10.764 14.736,13.212 14.966,13.441 14.966,15.461 U3.6@15.305,15.8
  Bottom Layer w0.117: v1(3.5,19.25) 3.563,19.25 3.735,19.422 14.171,19.422 14.38,19.213 14.38,18.962 v1(14.421,18.921)
USBC_N: J3.2 U1.P15 U5.3 | length 26.9
  Top Layer w0.117: v1(3.544,24.951) 3.544,22.581 8.425,17.7 9.075,17.7 9.425,17.35 9.425,14.629 7.306,12.51 7.306,9.306 J3.2@5.75,7.75 ; v1(4.2,29.1) U1.P15@4.6,29.5
  Bottom Layer w0.117: v1(3.544,24.951) 3.603,25.01 3.603,25.224 3.732,25.352 3.734,25.354 3.738,25.354 4.071,25.687 4.071,27.541 4.611,28.081 4.611,28.47 4.264,28.817 4.264,29.036 v1(4.2,29.1)
USBC_P: J3.3 U1.P16 U5.6 | length 21.9
  Top Layer w0.117: v1(3.192,25.408) 3.133,25.349 3.133,21.803 4.864,20.073 4.864,16.621 U5.6@5.685,15.8 ; v1(4.2,28.3) U1.P16@4.6,28.7 ; J3.3@5.75,9.75 4.736,10.764 4.736,14.851 U5.6@5.685,15.8 ; U5.6@6.01,15.8 U5.6@5.685,15.8
  Bottom Layer w0.117: v1(3.192,25.408) 3.218,25.434 3.499,25.434 3.64,25.574 ; 3.64,25.574 3.641,25.576 3.645,25.576 3.848,25.779 3.848,27.633 4.192,27.976 4.192,28.292 v1(4.2,28.3)
VDD1V8: C5.2 C6.1 C7.1 C8.1 C24.2 C25.2 C32.2 C34.1 C35.1 C36.1 C37.1 C38.1 C39.1 C40.1 C42.1 C43.1 C56.1 C58.1 C59.2 L1.2 R5.2 TP5.0 U1.A16 U1.B15 U1.B17 U1.C14 U1.C16 U1.D11 U1.D13 U1.D15 U1.E11 U1.E12 U1.E14 U1.F13 U1.G13 U1.G14 U2.9 U2.10 | length 69.1
  Top Layer w0.102: v1(4,50.25) 3.5,50.25 2.542,49.292 2.542,49.208 2.75,49 U2.9@7.4,49 U2.10@7.4,48.5 ; v1(9.8,30.7) U1.G14@10.2,30.3 ; v1(9.8,31.5) U1.G13@10.2,31.1 ; v1(10.6,30.7) U1.F13@11,31.1 ; v1(11.4,30.7) U1.E14@11.8,30.3 ; v1(11.4,32.3) U1.E12@11.8,31.9 U1.E11@11.8,32.7 ; v1(11.5,33.25) 12.05,33.25 U1.D11@12.6,32.7 ; v1(12.2,29.9) U1.D15@12.6,29.5 ; v1(12.2,31.5) U1.D13@12.6,31.1 ; v1(13,29.1) U1.C16@13.4,28.7 ; v1(13,29.9) U1.C14@13.4,30.3 ; v1(13.79,27.49) U1.B17@14.2,27.9 14.2,27.13 14.81,26.52 C35.1@14.81,26.5 ; U1.B15@14.2,29.5 v1(14.6,29.1) ; U1.A16@15,28.7 v1(15.4,28.3) ; R5.2@16.75,31.575 16.75,31.65 17.683,32.583 17.683,32.683 v1(17.75,32.75) ; v1(17.5,27.31) 17.5,27.33 17.98,27.81 C58.1@18,27.81 18.02,27.81 18.269,28.059 18.269,28.099 19.23,29.06 C59.2@19.25,29.06
  Top Layer w0.4: C25.2@16.2,48.95 16.795,48.355 16.795,48.191 ; 16.811,48.16 16.915,48.055 16.915,47.834 18.75,45.999 18.75,45.101 ; v1(18.25,32.75) v1(17.75,32.75) 17.75,34.349 18.699,35.298 18.699,37.449 18.398,37.751 18.398,41.699 18.602,41.903 18.602,44.953
  Top Layer w0.5: C25.2@16.2,48.95 C25.2@16.2,49 ; 16.795,48.191 16.811,48.175 16.811,48.16 ; 18.602,44.953 18.75,45.101
  SIGH w0.102: v1(4,50.25) 8.566,50.25 8.797,50.019 14.269,50.019 v1(14.75,50.5)
  Bottom Layer w0.102: C40.1@9.25,31.56 9.31,31.5 v1(9.8,31.5) ; C8.1@9.44,30 9.689,30.249 9.689,30.495 9.8,30.606 v1(9.8,30.7) ; C5.2@10.5,28.25 10.52,28.25 12.17,29.9 v1(12.2,29.9) ; C36.1@10.5,33.44 10.69,33.25 v1(11.5,33.25) ; v1(11.4,30.7) 11.4,30.04 C39.1@11.44,30 ; v1(11.4,32.3) 11.414,32.3 11.674,32.56 C38.1@12.25,32.56 ; C7.1@11.75,28.69 12.59,28.69 v1(13,29.1) ; v1(12.2,31.5) C37.1@12.92,31.5 12.92,31.52 13.397,31.997 13.397,32.467 13.31,32.554 C6.1@13.31,33 ; C34.1@13,27.94 13.173,27.767 13.533,27.767 13.79,27.51 v1(13.79,27.49) ; v1(13,29.9) 13.403,30.303 13.967,30.303 14,30.269 14.311,30.269 14.56,30.02 C56.1@14.56,30 C56.1@14.6,29.96 ; C43.1@14.5,28.25 14.6,28.35 v1(14.6,29.1) ; v1(15.4,28.3) 15.454,28.3 15.694,28.06 C42.1@16.25,28.06 ; v1(16,31.94) 16,31.92 16.73,31.19 C32.2@16.75,31.19 ; v1(18.25,32.75) TP5.0@19.5,32.75
VDD1V15: C1.2 C2.1 C3.1 C4.1 C31.2 C44.1 C55.1 TP6.0 U1.D6 U1.D8 U1.G5 U1.L6 U1.M7 U2.11 | length 30.7
  Top Layer w0.102: v1(5.8,36.3) U1.M7@6.2,35.9 ; v1(6.6,37.1) U1.L6@7,36.7 ; U1.G5@10.2,37.5 v1(10.6,37.9) ; U1.D8@12.6,35.1 v1(13,35.5) ; U1.D6@12.6,36.7 v1(13,37.1)
  Top Layer w0.5: v1(5,46.25) 5,46.75 v1(5.25,47) 5.05,47.2 C31.2@5.05,48
  Bottom Layer w0.102: v1(5.8,36.3) 5.8,36.206 5.94,36.066 C55.1@5.94,35.5 ; v1(6.6,37.1) 6.608,37.092 6.608,36.722 7.06,36.27 C2.1@7.06,36.25 ; C4.1@9.75,37.94 9.79,37.9 v1(10.6,37.9) ; C3.1@12.88,36.25 13,36.37 v1(13,37.1) ; v1(13,35.5) 13,34.81 C44.1@13.06,34.75 ; v1(16.098,35.793) 16.115,35.81 C1.2@17.25,35.81 17.25,34.938 17.31,34.878 17.31,34.122 17.143,33.956 17.143,32.926 17.347,32.722 17.347,31.833 19.43,29.75 TP6.0@19.5,29.75
  Bottom Layer w0.2: v1(5.25,47) 5.25,46.5 v1(5,46.25) 5,44.25 6.651,42.599 6.651,42.154 7.223,41.582 8.418,41.582 8.773,41.227 8.773,39.227 9,39 v1(9,37) v1(9,36.25)
VDD3V3: C9.2 C10.1 C11.2 C12.1 C13.1 C15.1 C16.1 C17.2 C18.1 C19.1 C20.1 C30.2 C45.1 C53.1 C54.2 C57.1 J4.4 J5.1 J5.17 J6.1 J7.1 R11.2 R13.1 R14.2 R19.2 R20.2 R21.2 R22.2 R23.2 R24.2 R25.2 R26.2 R27.2 R28.2 R29.2 R30.2 TP4.0 U1.C2 U1.C6 U1.F5 U1.K4 U1.L4 U1.M3 U1.M15 U1.N11 U1.R6 U1.R12 U2.8 U6.4 U6.5 U6.12 U6.13 Y1.4 | length 71.7
  Top Layer w0.102: v1(3.4,31.5) U1.R12@3.8,31.9 ; v1(3.4,37.1) U1.R6@3.8,36.7 ; U6.12@3.75,55.235 3.75,54.5 v1(4,54.25) ; U6.5@3.75,56.765 3.75,57.04 v1@4.21,57.5 ; R13.1@3.853,26.351 3.928,26.351 4.779,25.5 v1(6.675,25.5) 6.75,25.5 7.5,26.25 R11.2@7.575,26.25 ; 4,54.487 4.06,54.427 4.144,54.427 4.25,54.534 U6.13@4.25,55.235 ; U6.4@4.25,56.765 v1(4.25,57.5) ; v1(5,32.306) 5.003,32.306 5.397,32.7 U1.N11@5.4,32.7 ; v1(5.8,29.1) U1.M15@6.2,29.5 ; v1(5.8,39.5) U1.M3@6.2,39.1 ; v1(6.6,38.7) U1.L4@7,38.3 ; v1(7.4,38.7) U1.K4@7.8,38.3 ; C30.2@7.5,52.2 7.039,51.739 v1(6.246,51.739) 6.246,51.704 8,49.95 U2.8@8,49.6 ; C45.1@10.75,21.69 12.44,21.69 Y1.4@12.65,21.48 v1(12.65,20.4) ; U1.F5@11,37.5 v1(11.4,37.9) ; U1.C6@13.4,36.7 v1(13.8,37.1) ; U1.C2@13.4,39.9 v1(13.8,40.3) ; v1(15,56.075) 15.075,56.075 15.5,55.65 R19.2@15.5,55.575 ; v1(16.325,60.5) 16.4,60.5 17,59.9 R24.2@17,59.825 ; R25.2@17,54.675 v1(17.575,54.675) ; R14.2@17.25,42.925 v1(17.25,43.5)
  Bottom Layer w0.089: v1(5,32.306) 5.077,32.306 5.576,32.804 5.994,32.804 C19.1@6.25,33.06 ; v1(7.4,38.7) 7.4,38.613 7.56,38.453 C13.1@7.56,38 ; C16.1@13,41.19 13.02,41.19 13.731,40.479 13.731,40.369 v1(13.8,40.3)
  Bottom Layer w0.102: v1(1.25,35.5) R27.2@1.25,36.25 ; C17.2@2.44,31.5 v1(3.4,31.5) 3.4,30.79 C18.1@3.5,30.69 ; C11.2@2.5,41.31 2.749,41.559 2.959,41.559 R22.2@3.75,42.35 ; v1(3.075,46.75) 3.15,46.75 3.75,46.15 R23.2@3.75,46.075 ; v1(3.4,37.1) 4.21,37.1 C20.1@4.25,37.06 ; R22.2@3.75,42.425 R22.2@3.75,42.35 ; v1(3.796,41.75) 3.796,42.304 R22.2@3.75,42.35 ; C12.1@5.75,28.44 5.8,28.49 v1(5.8,29.1) ; C15.1@5.75,40.31 5.8,40.26 v1(5.8,39.5) ; R30.2@6,24.825 6,24.9 6.6,25.5 v1(6.675,25.5) 7.075,25.5 7.426,25.149 7.501,25.149 7.75,24.9 R26.2@7.75,24.825 ; v1(6.246,51.739) 6.661,51.739 ; J5.1@6.45,47.7 6.45,48.8 v1(5.5,49.75) 6.5,50.75 R20.2@6.5,50.825 R21.2@7.5,50.825 7.5,50.9 6.661,51.739 ; v1(9.425,25.325) R28.2@10,25.325 ; J5.17@10.45,47.7 10.45,48.075 11.856,49.481 12.811,49.481 13.06,49.73 13.06,49.77 12.31,50.52 C53.1@12.31,51 11.425,51 10,52.425 J4.4@10,52.775 9.557,52.775 9.421,52.639 9.421,52.026 9.277,51.882 6.805,51.882 6.661,51.739 ; C57.1@10.63,35.75 10.879,35.999 10.879,36.815 10.997,36.933 10.997,37.497 v1(11.4,37.9) ; J7.1@11.04,17.465 11.04,18.49 11.359,18.809 11.841,18.809 11.935,18.903 12.753,18.903 12.906,18.75 v1(13,18.75) ; R29.2@11.5,25.325 v1(12.075,25.325) ; v1(13.8,37.1) 13.867,37.033 14.007,37.033 14.48,36.56 C10.1@14.5,36.56 ; v1(15.75,37.25) 15.75,37.344 15.903,37.497 15.903,37.649 ; C9.2@15.81,39 15.903,38.907 15.903,37.649 ; TP4.0@19.5,36 17.653,37.847 16.833,37.847 16.736,37.944 16.198,37.944 15.903,37.649
VDD5V: C23.2 C49.2 C50.2 C51.2 C52.1 J1.1 J2.1 J3.1 J5.2 J5.4 R1.2 R2.2 R31.1 TP3.0 U2.6 U2.7 U3.1 U4.1 U5.1 | length 75.4
  Top Layer w0.089: C23.2@9.75,52.2 9.8,52.2 11.503,53.903 v1(11.503,53.95) v1@11.503,53.997 ; R1.2@13.075,46.75 v1(13.075,46.075) 13.075,45.279 14,44.354 R31.1@14,43.325
  Top Layer w0.102: v1(8.25,42.25) 8.317,42.317 8.462,42.317 9.706,43.56 9.706,43.584 10.047,43.925 R2.2@10.5,43.925 ; v1(13.348,42.5) 12.945,42.903 12.945,43.245 13.181,43.481 13.844,43.481 R31.1@14,43.325
  Top Layer w0.4: J2.1@11.1,62.674 11.1,60.374 12,59.474 12,58 11.625,57.625 10.945,57.625 U4.1@10.87,57.55 10.925,57.55 11,57.475 v1(11,56.75) ; v1(11.75,56) v1(11,56) v1(11,56.75) ; C49.2@12.56,57 12.56,56.98 12.51,56.93 12.49,56.93 12.31,56.75 v1(11,56.75) ; v1(18,14.75) 18,15.43 18.12,15.55 18.12,15.725 18.195,15.8 U3.1@18.37,15.8
  Top Layer w0.5: v1(2.5,15.5) C52.1@2.5,16.31 ; v1(4,14.75) C51.2@4,15.95 ; J3.1@5.75,5.75 11.5,11.5 ; v1(8.75,15.25) U5.1@8.75,15.8 ; 8.75,49.5 8.75,51.25 9.7,52.2 C23.2@9.75,52.2 ; v1(9.5,14) 9.7,14.2 11.1,14.2 C50.2@11.5,14.6 ; v1(14,14.5) 13.9,14.6 C50.2@11.5,14.6 ; J1.1@15.75,5.75 11.5,10 11.5,11.5 ; 11.5,11.5 C50.2@11.5,14.6
  SIGH w0.089: v1(13.075,46.075) 13.517,46.075 13.587,46.144 14.298,46.144 14.339,46.104 15.543,46.104 15.745,46.306 16.255,46.306 16.36,46.2 18.258,46.2 19.25,45.209 v1(19.25,44.75)
  SIGH w0.102: v1(8.25,42.25) 8.798,42.25 8.987,42.439 9.717,42.439 10.11,42.046 12.894,42.046 v1(13.348,42.5)
  Bottom Layer w0.102: J5.2@6.45,43.8 J5.4@6.95,43.8 6.95,42.23 7.333,41.847 7.847,41.847 v1(8.25,42.25)
  Bottom Layer w0.5: v1(8.75,15.25) 8.75,14.75 v1(9.5,14) ; v1(14,14.5) 17.75,14.5 v1(18,14.75) ; v1(19.25,39.5) 19.404,39.346 19.404,38.846 TP3.0@19.5,38.75
pads on no net: H1.1 H2.1 H3.1 H4.1 J2.4 J2.M J5.27 J5.28 J7.7 U1.A3 U1.A4 U1.A9 U1.A10 U1.A11 U1.B3 U1.B4 U1.B5 U1.B7 U1.B10 U1.B11 U1.C4 U1.C10 U1.C17 U1.D1 U1.D2 U1.D7 U1.D10 U1.D12 U1.D16 U1.D17 U1.E1 U1.E3 U1.E4 U1.E15 U1.E16 U1.E17 U1.F14 U1.G15 U1.G16 U1.G17 U1.H1 U1.H2 U1.H14 U1.H15 U1.H16 U1.H17 U1.J14 U1.J16 U1.J17 U1.K14 U1.K15 U1.K16 U1.K17 U1.L17 U1.N17 U1.P5 U1.P6 U1.P8 U1.P9 U1.P13 U1.R1 U1.R2 U1.R4 U1.R5 U1.R7 U1.R8 U1.R10 U1.R13 U1.R14 U1.T1 U1.T3 U1.T4 U1.T5 U1.T7 U1.T8 U1.T9 U1.T13 U1.T14 U1.U2 U1.U3 U1.U4 U1.U5 U1.U7 U1.U8 U1.U9 U1.U14 U3.2 U3.5 U4.2 U4.5 U5.2 U5.5 Y1.1

## Polygon pours and split planes (outlines as drawn)
VDD1V15 on Top Layer "VDD1V15_L01_P003" (solid, pour order 3): 7,48.25 6.5,48.75 4.5,48.75 4.5,45.5 4.75,45.5 7,47.75 7.75,47.75 7.75,48.25
VDD1V8 on Top Layer "VDD1V8_L01_P002" (solid, pour order 2): 13.75,51.75 13.75,49.25 14.75,48.25 16.75,48.25 16.75,51.75
NetL1_1 on Top Layer "NETL1_1_L01_P000" (solid, pour order 0): 9.5,49.6 9.6,49.5 12.75,49.5 12.75,51.75 11.25,51.75 9.5,50
VDD3V3 on Power "VDD3V3_L05_P011" (solid, pour order 11): 0,70 21,70 21,3 0,3
VDD1V15 on Power "VDD1V15_L05_P010" (solid, pour order 10): 5.25,37.75 9.5,37.75 10,38.25 10.75,38.25 11.5,37.5 13,37.5 13.75,36.75 18.75,36.75 18.75,34.058 18.692,34 5.25,34
VDD5V on Power "VDD5V_L05_P008" (solid, pour order 8): 9.75,57.5 12.5,57.5 12.5,53.75 14.25,52 21,52 21,3 0,3 0,16.5 18,16.5 19,17.5 18.75,17.75 18.75,50.75 18.5,51 12.5,51 9.75,53.75
VDD1V8 on Power "VDD1V8_L05_P009" (solid, pour order 9): 18.75,33.942 18.692,34 9.25,34 9.25,26.75 9.5,26.5 18.75,26.5
GND on GND "GND_L02_P005" (solid, pour order 5): 0,70 21,70 21,3 0,3

## Silkscreen, mask and mechanical layers (free items; w line width, h text height)
Top Overlay:
  text "3V3" at 17.667,66.667 h1
  text "TX" at 18.167,65.167 h1
  text "RX" at 18.167,63.667 h1
  text "GND" at 17.667,62.167 h1
  text "RST" at 1.417,47.333 h1 r270
Bottom Overlay:
  text "5V" at 20.333,36.917 h1
  text "3V3" at 20.333,33.917 h1
  text "1V8" at 20.333,30.917 h1
  text "FROGSBORO v1.0.2 / iank@iank.org" at 3.75,29.1 h1 r90
  text "1V15" at 20.333,27.917 h1
  text "GND" at 20.333,23.917 h1
Board Shape:
  lines w0.254: -3.5,5 -3.5,3 -7.75,3 -7.75,70 -3.5,70 -3.5,68 0,68 ; -3.5,5 -3.5,5 ; -3.5,5 0,5 ccw(c2,5) 2,3 19,3 ccw(c19,5) 21,5 24.5,5 24.5,3 28.75,3 28.75,70 24.5,70 24.5,68 21,68 ccw(c19,68) 19,70 2,70 ccw(c2,68) 0,68 ; 0,68 0,68 ; 0,68 0,68 ; -3.5,9 ccw(c-2.5,9) -2.5,8 -1,8 ccw(c-1,9) 0,9 0,64 ccw(c-1,64) -1,65 -2.5,65 ccw(c-2.5,64) -3.5,64 -3.5,9 ; 21,9 ccw(c22,9) 22,8 23.5,8 ccw(c23.5,9) 24.5,9 24.5,64 ccw(c23.5,64) 23.5,65 22,65 ccw(c22,64) 21,64 21,9
  text "CUTOUT" at 23.556,38.096 h1.52 r90
  text "CUTOUT" at -1.004,37.504 h1.52 r90